# Allegro board CAD_EX7302.brd
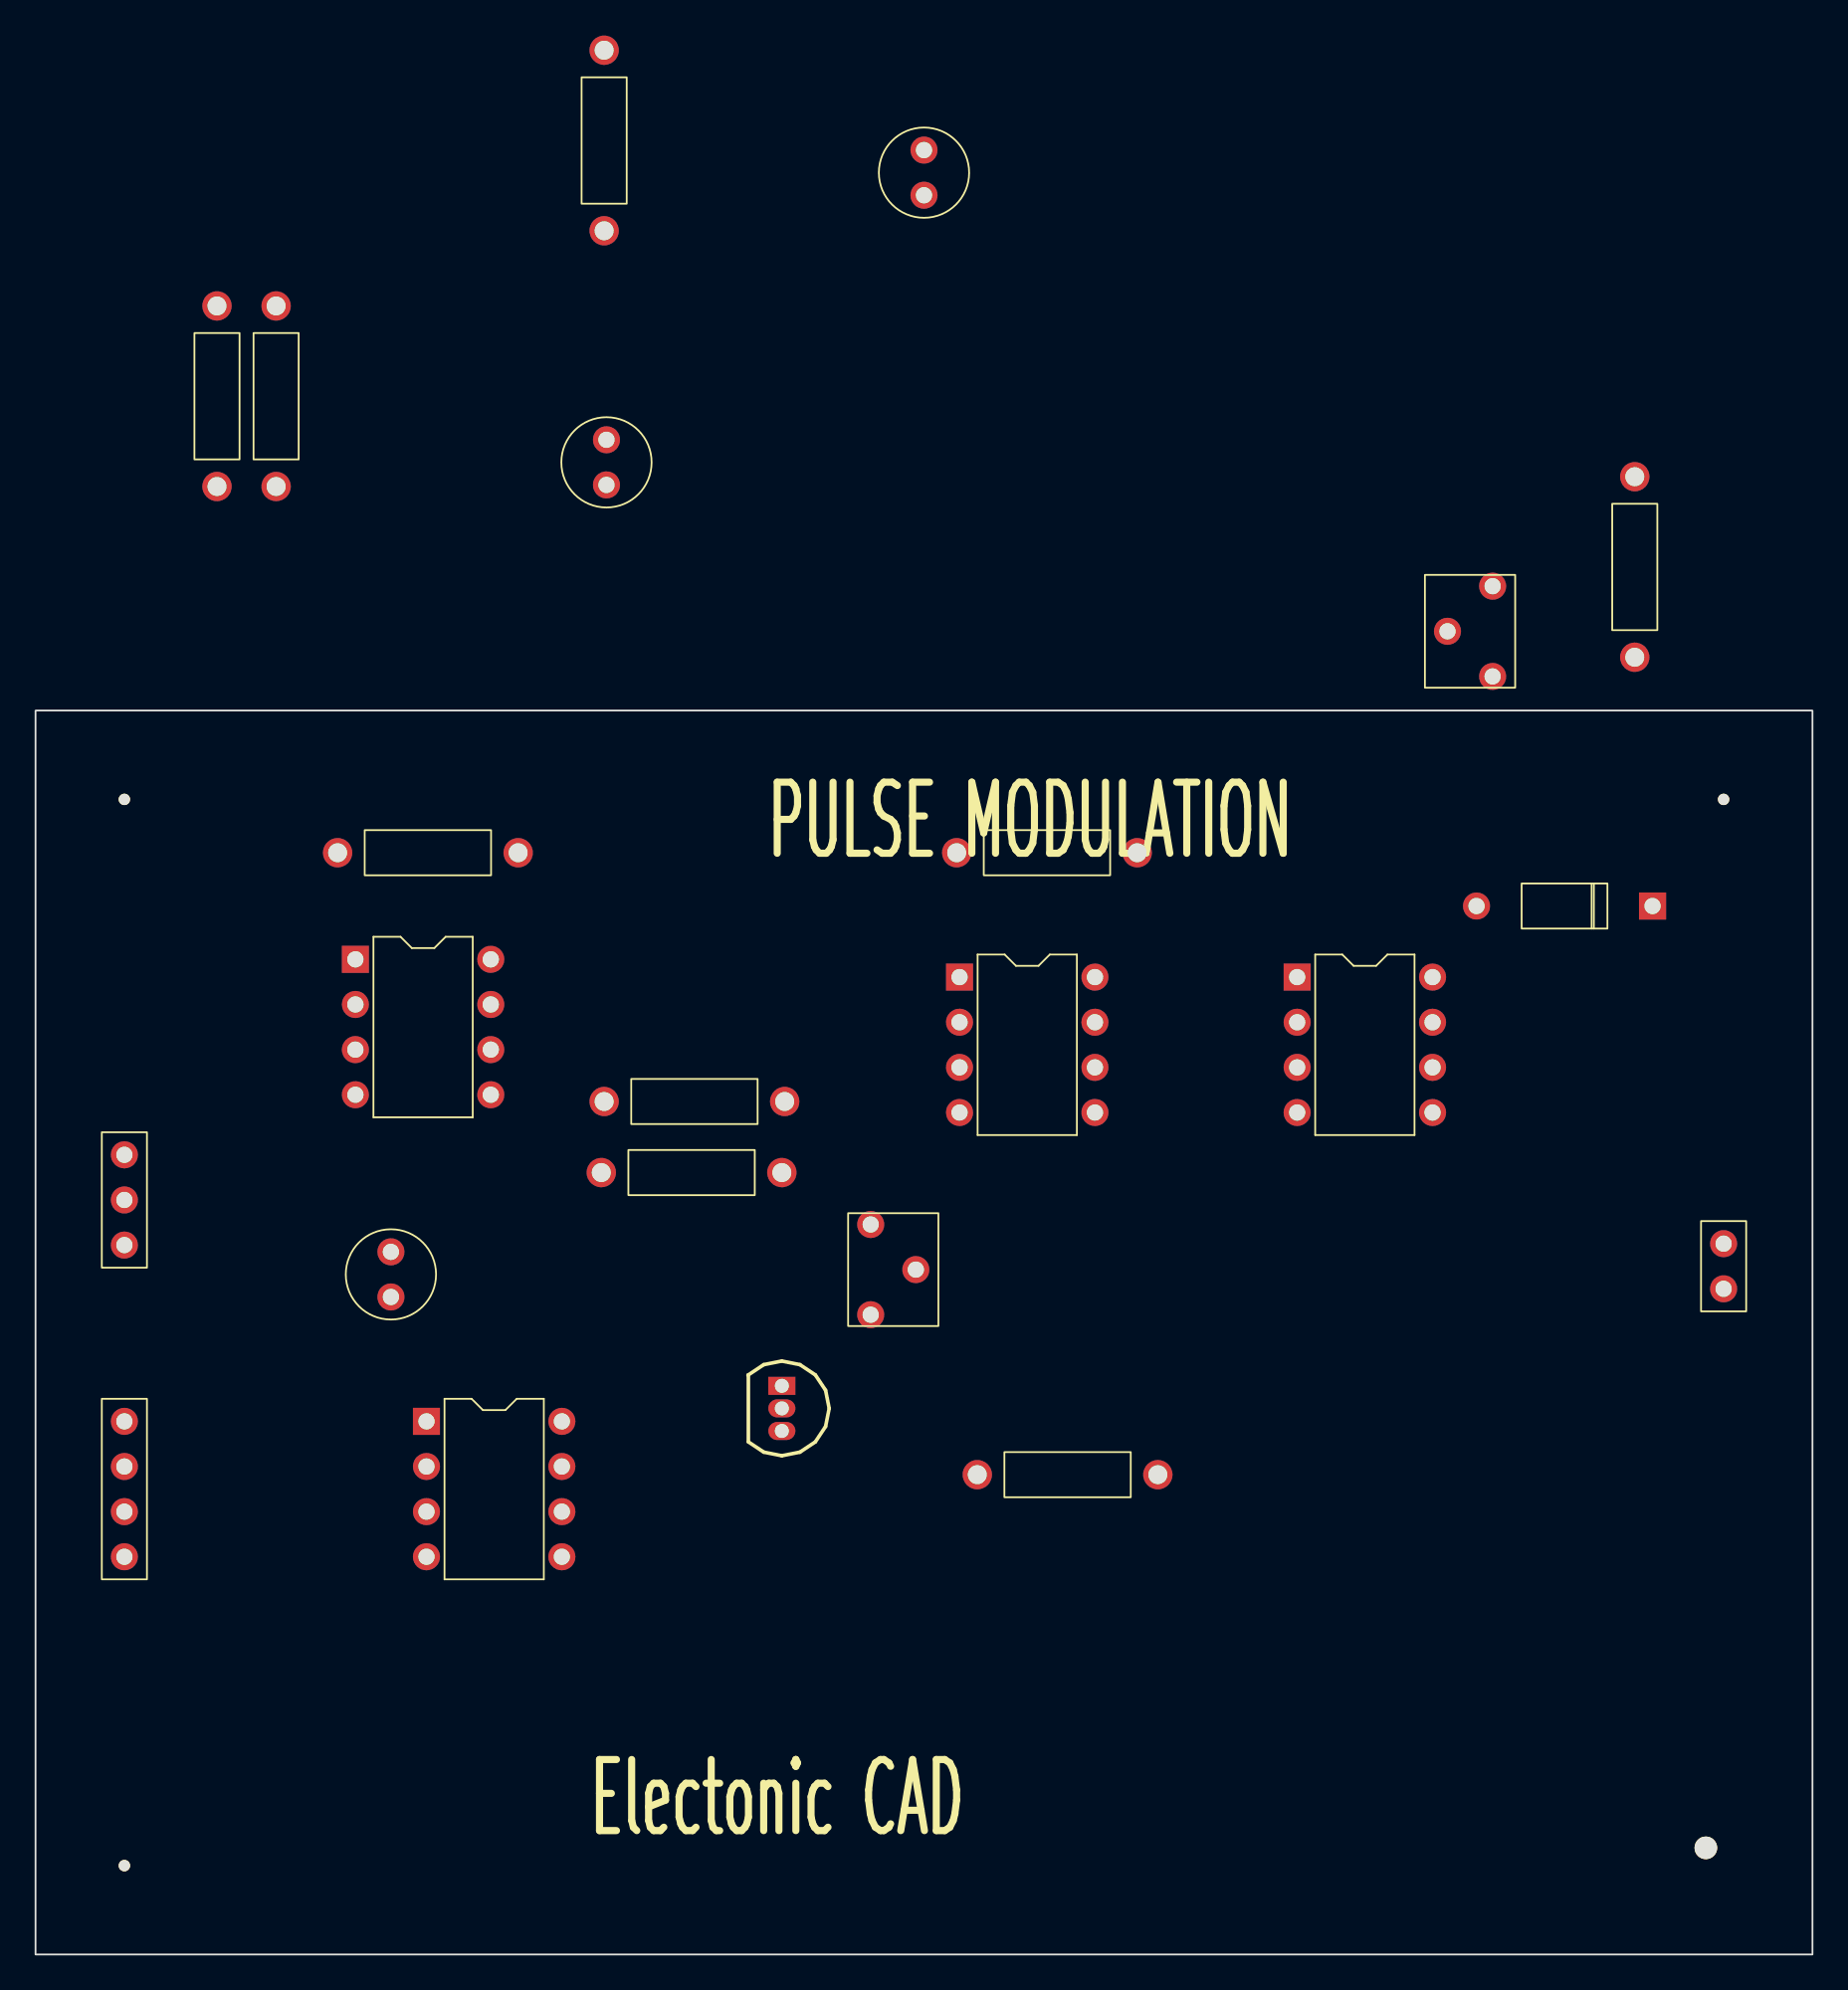
[diagram p0: board, top side]
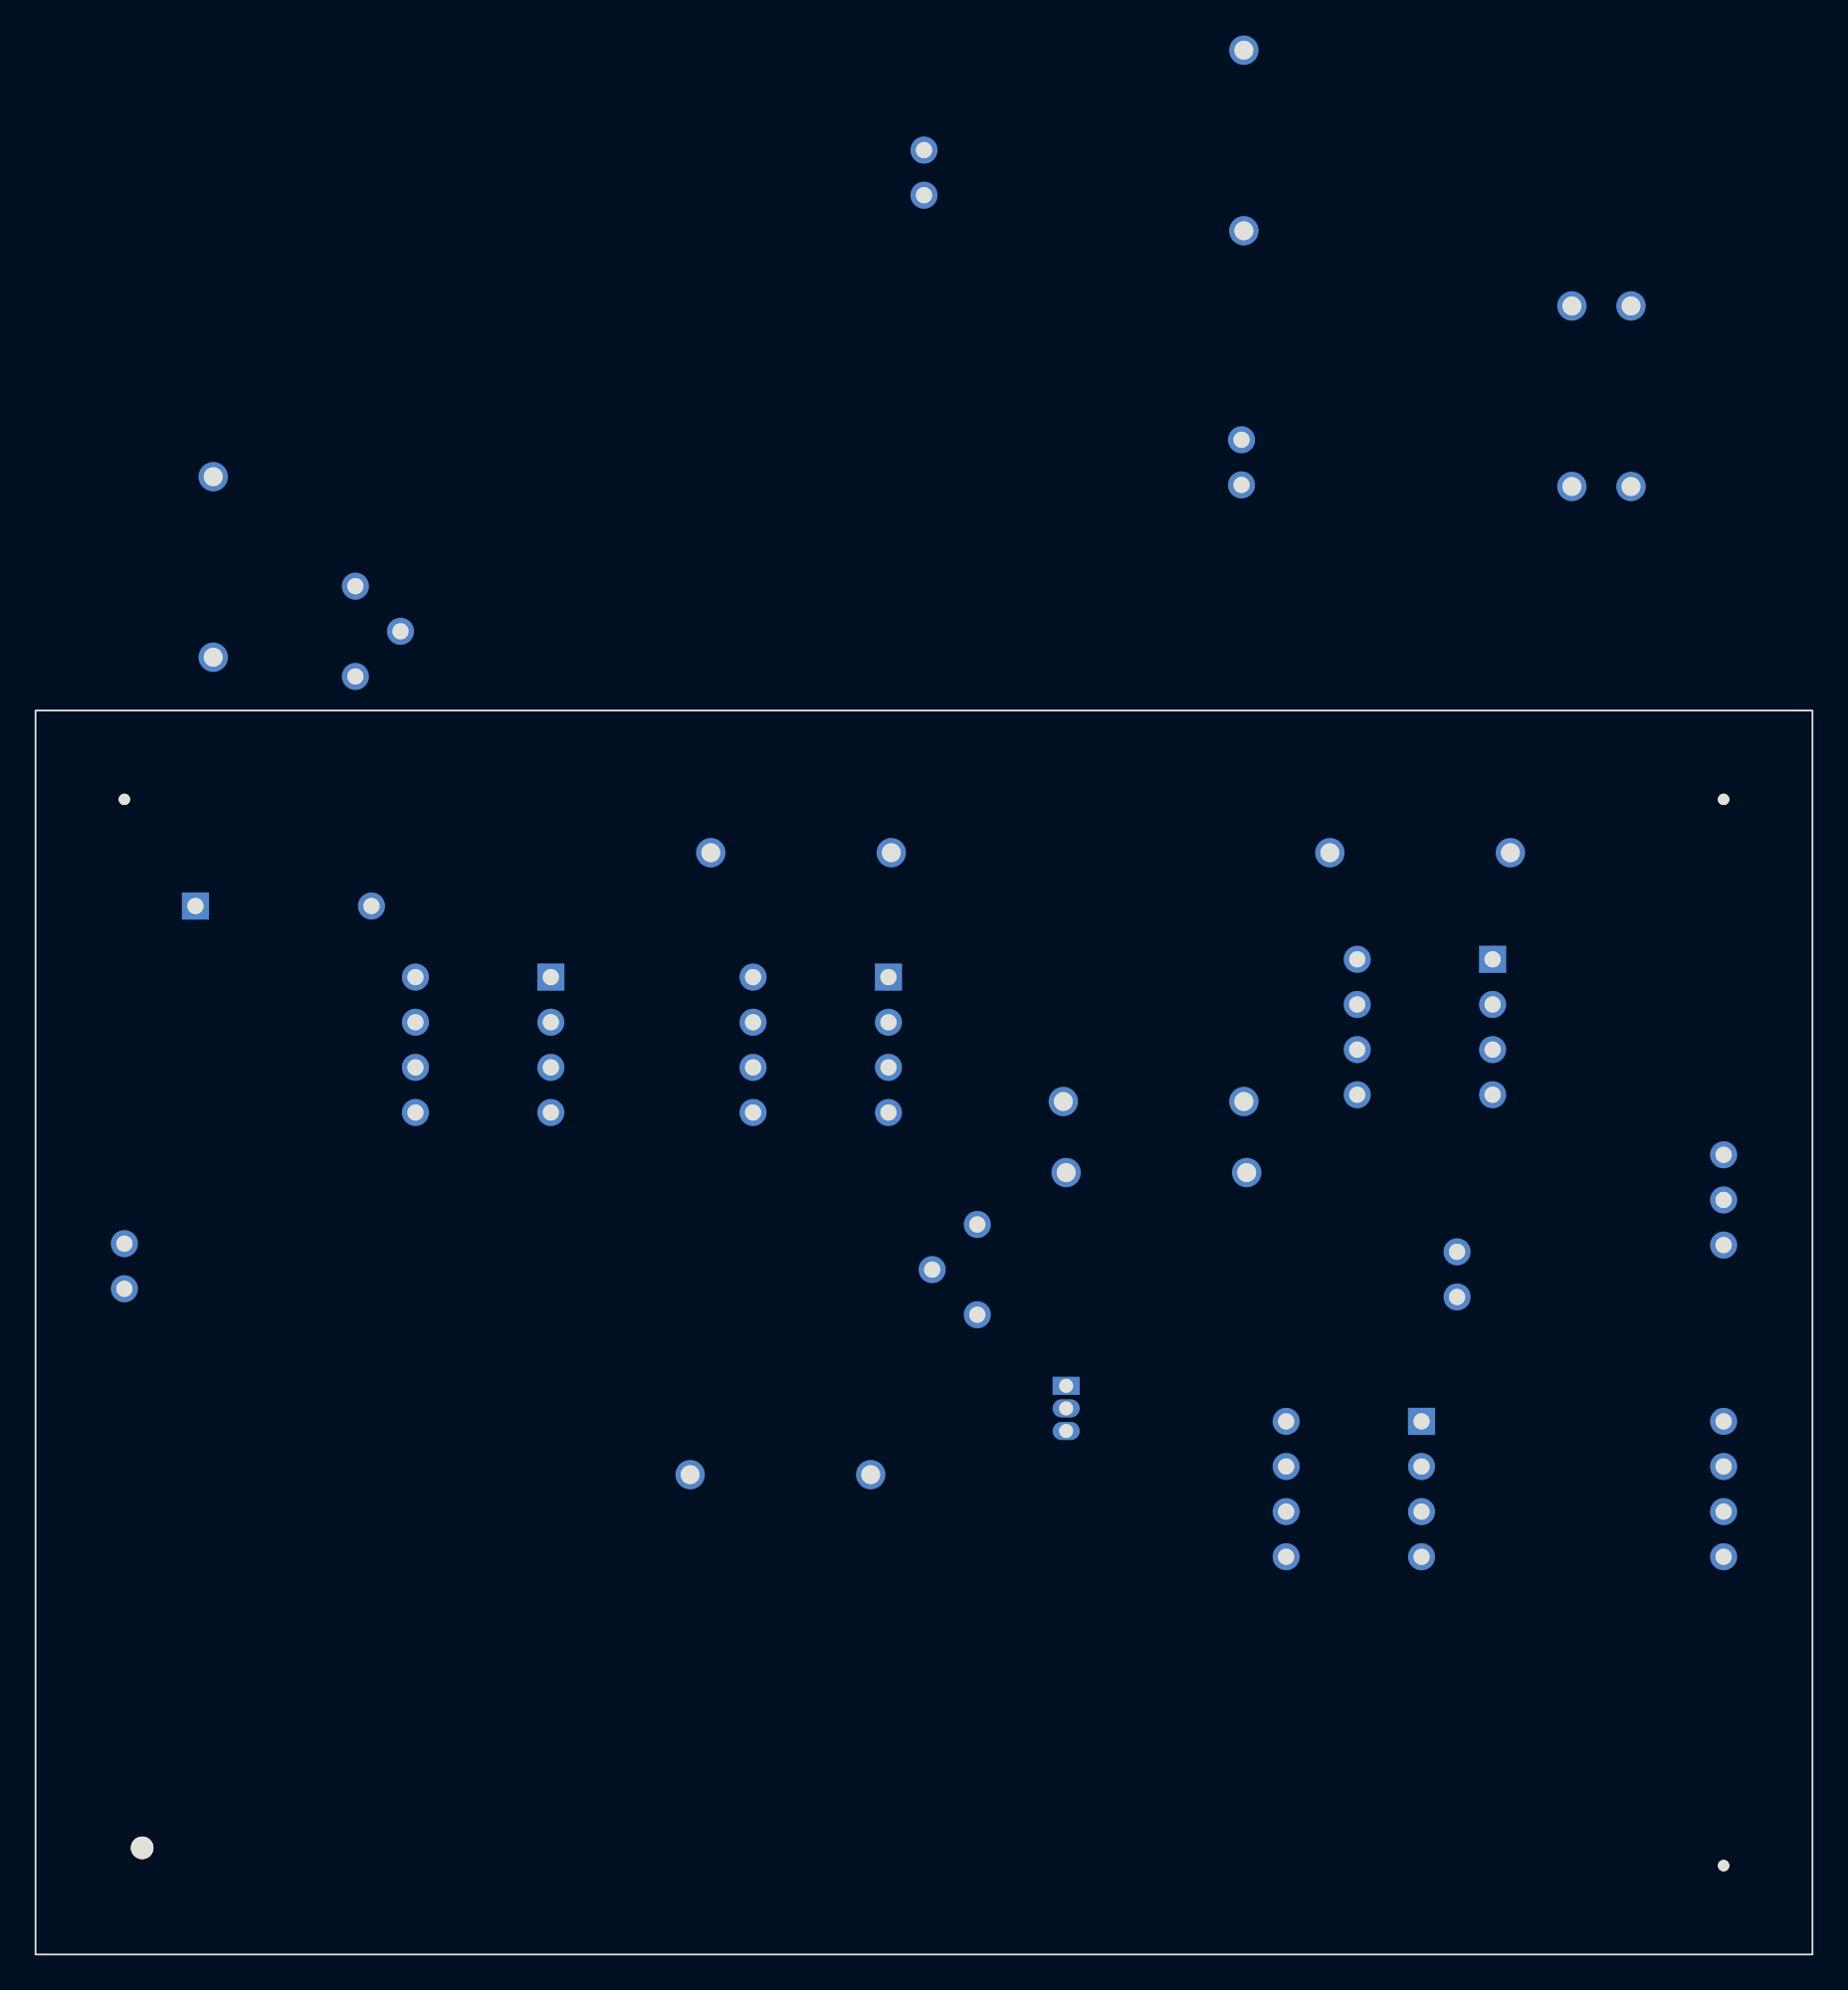
[diagram p1: board, bottom side, seen from below]

Outline 100 x 70 mm; copper layers: TOP, BOTTOM. Coordinates in mm from the lower left corner of the outline.
Outline path: rectangle 0,0 100,70

## Design rules (mm)
constraint set DEFAULT: min track width 0.127

## Placement (name value [footprint] x y rotation side)
C1  0.01uF  [CAP196]  50 99 0 top
C2  0.01uF  [CAP196]  32.13 82.7 0 top
C3  0.01uF  [CAP196]  20 37 0 top
D1  d  [DO41]  91 59 90 top
J1  CON4  [JUMPER4]  5 30 270 top
J2  CON3  [JUMPER3]  5 45 270 top
J3  CON2  [JUMPER2]  95 40 270 top
NOREF  -  [unnamed]  5 5 0 top
NOREF#2  -  [unnamed#2]  94 6 0 top
NOREF#3  -  [unnamed]  5 65 0 top
NOREF#4  -  [unnamed]  95 65 0 top
Q1  25A1015  [TO92]  42 32 270 top
R1  580  [RES400]  90 73 0 top
R2  39K  [RES400]  42 44 90 top
R3  6.2K  [RES400]  53 27 270 top
R4  100K  [RES400]  32 97 0 top
R5  10K  [RES400]  17 62 270 top
R6  10K  [RES400]  62 62 90 top
R7  10K  [RES400]  32 48 270 top
R8  10K  [RES400]  10.21 82.61 0 top
R9  10K  [RES400]  13.54 82.61 0 top
U1  NE555  [DIP8_3]  22 30 0 top
U2  LF358  [DIP8_3]  52 55 0 top
U3  LF398  [DIP8_3]  18 56 0 top
U4  LF356  [DIP8_3]  71 55 0 top
VR1  5K  [RESADJ]  47 36 180 top
VR2  20K  [RESADJ]  82 77 0 top

## Library data of the parts
C1-C3 = CAP NP: Tolerance: ***; User Part Number: ***
D1 = d_0
J1 = CON4_0: User Part Number: ***
J2 = CON3_0: User Part Number: ***
J3 = CON2: User Part Number: ***
Q1 = PNP BCE
R1-R9 = R: Tolerance: ***; User Part Number: ***
U1 = NE555_4: Tolerance: ***; User Part Number: ***
U2 = LF356_1: Tolerance: ***; User Part Number: ***
U3 = LF398: Tolerance: ***; User Part Number: ***
U4 = LF356_2: Tolerance: ***; User Part Number: ***
VR1 VR2 = POT: Tolerance: ***; User Part Number: ***

## Footprints (pads in the part's own frame, mm; a bottom-side part is the same pattern mirrored in y, then rotated)
CAP196
  round 1.524 hole 0.914: 1(0,0) 2(0,2.54)
DIP8_3
  rect 1.524x1.524 hole 0.914: 1(0,0)
  round 1.524 hole 0.914: 2(0,-2.54) 3(0,-5.08) 4(0,-7.62) 5(7.62,-7.62) 6(7.62,-5.08) 7(7.62,-2.54) 8(7.62,0)
DO41
  rect 1.524x1.524 hole 0.914: 1(0,0)
  round 1.524 hole 0.914: 2(0,9.906)
JUMPER2
  round 1.524 hole 0.914: 1(0,0) 2(2.54,0)
JUMPER3
  round 1.524 hole 0.914: 1(0,0) 2(2.54,0) 3(5.08,0)
JUMPER4
  round 1.524 hole 0.914: 1(0,0) 2(2.54,0) 3(5.08,0) 4(7.62,0)
RES400
  round 1.651 hole 1.067: 1(0,0) 2(0,10.16)
RESADJ
  round 1.524 hole 0.914: 1(0,0) 2(-2.54,-2.54) 3(0,-5.08)
TO92
  rect 1.016x1.524 hole 0.787: 1(0,0)
  oval 1.016x1.524 hole 0.787: 2(1.27,0) 3(2.54,0)
unnamed
  round 0.635 hole 3.175 unplated: (0,0)
unnamed#2
  round 1.27 hole 3.962 unplated: (0,0)

## Nets
+5V: J1.2 R2.1 U1.8(VCC) VR1.2(WIPER) VR1.3
+15V: J1.1 U2.7(V5) U3.1 U3.4(VCC-) U4.7
-15V: J1.4 U2.4 U4.4(V-)
GND: C1.2 C2.1 C3.2 J1.3 J2.3 J3.2 R4.2 R8.1 R9.1 U1.1 U2.3 U3.7
CLOCK: U1.2
SIG_1: R5.1 U2.6 VR2.3
N00375: C1.1 Q1.1 Q1.3(E) R2.2 R3.1 R4.1 U1.6 U1.7
N00403: C2.2 U1.5
N00660: Q1.2 VR1.1
N01426: R1.1 R3.2 U2.2
N02047: R1.2 VR2.1 VR2.2(WIPER)
N03268: J2.1 U3.3
N03284: J2.2 U3.8
N03449: C3.1 U3.6
N03576: R7.1 U3.5
N03657: R5.2 R6.1 R7.2 R8.2 U4.2 U4.3
N04198: R6.2 U4.6
N04568: D1.1
N04574: D1.2 J3.1 R9.2

Pads without a net: U1 3 4; U2 1 5 8; U3 2; U4 1 5 8

## Text on the board
Ref Des/Silkscreen Top: Electonic CAD | PULSE MODULATION
